# Altium PCB LANA_TNY_00.PcbDoc
Units mm, origin at the board's own origin, x right, y up, seen from the top; angles counter-clockwise.
Board outline 17.78 x 20.32 mm, 2 copper layers (Top Layer, Bottom Layer), stack 0.821 mm thick; 31 components, 32 nets, 148 pads, 33 vias.
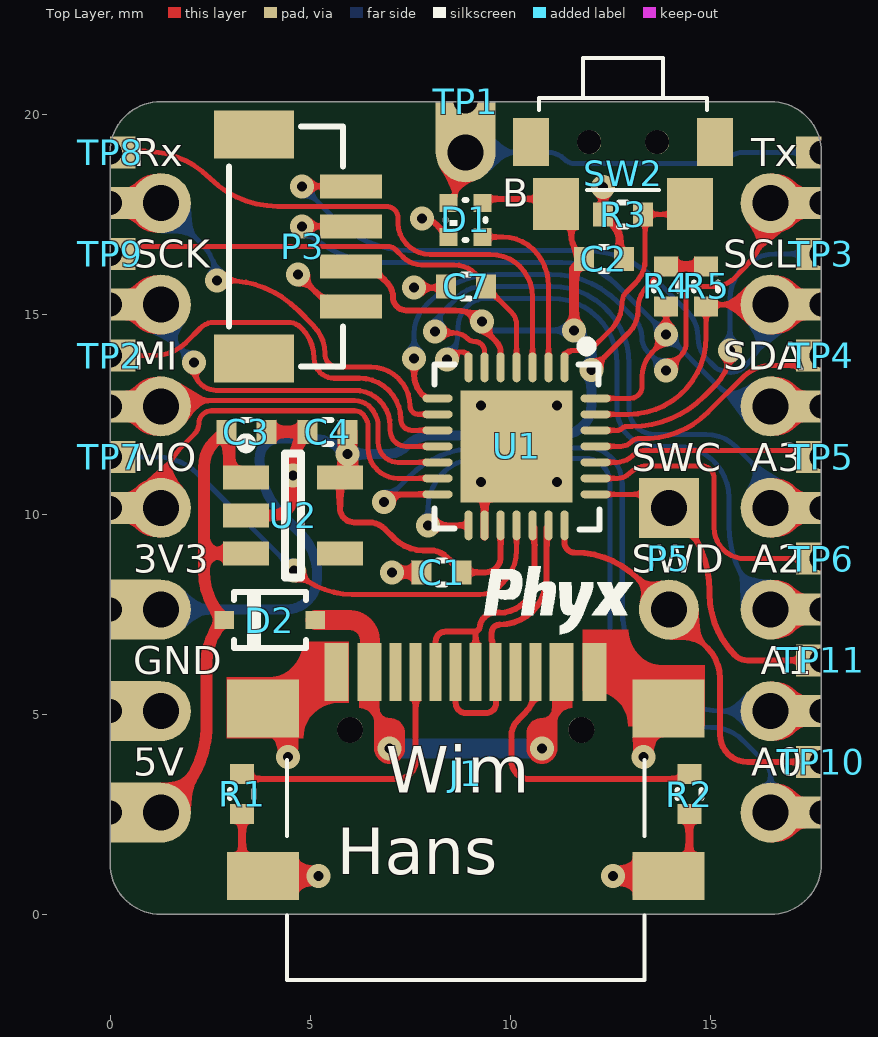
[diagram p0: Top Layer view]
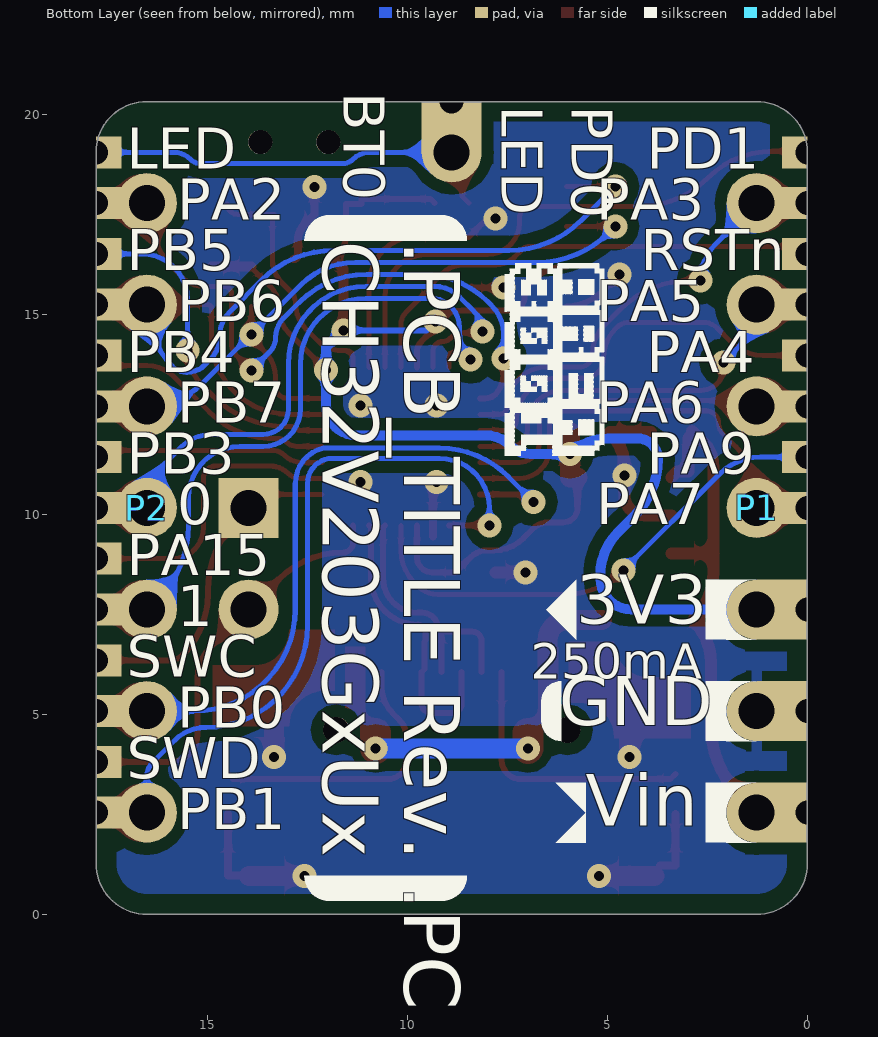
[diagram p1: Bottom Layer view, seen from below]

## Layer stack, top to bottom
Top Solder: solder mask 0.0102, Solder Resist, Dk 3.5
Top Layer: signal copper 0.0356
Dielectric1: core 0.75, FR-4, Dk 4.8
Bottom Layer: signal copper 0.0356
Bottom Solder: solder mask 0.0102, Solder Resist, Dk 3.5

## Board outline
0,1.27 0,19.05 cw(c1.27,19.05) 1.27,20.32 16.51,20.32 cw(c16.51,19.05) 17.78,19.05 17.78,1.27 cw(c16.51,1.27) 16.51,0 1.27,0 cw(c1.27,1.27)

## Design rules (kind name [scope] priority, off if disabled: settings)
BoardOutlineClearance [NOT OnLayer('Top Overlay') AND NOT OnLayer('Bottom Overlay') AND NOT IsText] p1: gap=0.5 ignorepadtopadclearanceinfootprint=FALSE except(0: Arc-SplitContinuation Track-SplitContinuation SMDPad-SplitContinuation THPad-SplitContinuation Via-SplitContinuation Fill-SplitContinuation Poly-SplitContinuation Region-SplitContinuation Text-SplitContinuation; 0.25: Track-OutlineEdge SMDPad-OutlineEdge THPad-OutlineEdge)
Clearance [All] p1: gap=0.15 ignorepadtopadclearanceinfootprint=FALSE except(0: Arc-Hole Track-Hole SMDPad-Hole THPad-Hole Via-Hole Fill-Hole Poly-Hole Region-Hole Text-Hole; 0.127: Arc-Arc Arc-Track Arc-SMDPad Arc-THPad Arc-Via Arc-Region Track-Track Track-SMDPad Track-THPad Track-Via Track-Region SMDPad-SMDPad; 0.25: SMDPad-Poly Poly-Region; 0.3: Arc-Poly Track-Poly THPad-Poly Via-Poly Fill-Poly; 0.5: Poly-Poly)
ComponentClearance ComponentClearance_J2/D6/D10 [InComponent('J2') vs InComponent('D6') OR InComponent('D10')] p1: gap=0.254 collisioncheckmode=3 verticalgap=0 showdistances=FALSE
ComponentClearance [All] p2: gap=0.254 collisioncheckmode=3 verticalgap=0.254 showdistances=FALSE
DiffPairsRouting [All] p1: maxlimit=0.15 minlimit=0.15 mostfreqgap=0.15 toplayer_minwidth=0.15 toplayer_maxwidth=0.15 toplayer_prefwidth=0.15 bottomlayer_minwidth=0.15 bottomlayer_maxwidth=0.15 bottomlayer_prefwidth=0.15 maxuncoupledlength=12.7
HoleSize [All] p1: absolutevalues=TRUE maxlimit=10 minlimit=0.025 maxpercent=80.000 minpercent=20.000
PolygonConnect PolygonConnect_VIA [IsVia] p1: connectstyle=Direct reliefconductorwidth=0.254 reliefentries=4 polygonreliefangle="90 Angle" airgapwidth=0.254
PolygonConnect [All] p2: connectstyle=Relief reliefconductorwidth=0.254 reliefentries=4 polygonreliefangle="90 Angle" airgapwidth=0.254
RoutingVias [All] p1: holewidth=0.3 width=0.7 viastyle="Through Hole" minholewidth=0.3 minwidth=0.2 maxholewidth=0.6 maxwidth=1.2
SilkToSolderMaskClearance SilkscreenOverComponentPads [IsPad] p1: minsilkscreentomaskgap=0.254 clearancetoexposedcopper=TRUE
SolderMaskExpansion [All] p1: expansion=0.05 istentingtop=FALSE
Width [All] p1: maxlimit=5 minlimit=0.127 preferedwidth=0.25
26 further rules are at their usual default settings.

## Classes and differential pairs
net class 90r: USB.D_n USB.D_p
net class POWER: GND VSYS VUSB
differential pair USB.D: +USB.D_p -USB.D_n

## Components (designator, comment, footprint, x,y, rotation, side; value= is the part's Value field where it differs from the comment)
C1 "CAP_CERAMIC" C0402 8.29,8.55 r180 top value="100nF 16V"
C2 "CAP_CERAMIC" C0402 12.344,16.383 r0 top value="100nF 16V"
C3 "CAP_CERAMIC" C0402 3.404,12.062 r0 top value="1uF 10V"
C4 "CAP_CERAMIC" C0402 5.436,12.062 r180 top value="1uF 10V"
C7 "CAP_CERAMIC" C0402 8.9,15.7 r180 top value="100nF 16V"
D1 "WS2812 based digital RGB LED 1010 package" LED_1010_WS2812B 8.89,17.358 r0 top value=XL-1010RGBC-WS2812B
D2 "CUS10S30 Schottky Power Rectifier, 1A, 30V" SOD-323_AC 3.991,7.355 r180 top value=CUS10S30,H3F
J1 "USB 2.0 C Reversible Receptacle Horizontal full SMD" XUNPU-TYPEC-304S-ACP16 8.89,3.51 r0 top value=TYPEC-304S-ACP16
P1 "Header 7" HDR1X7 1.27,2.54 r90 bottom
P2 "Header 7" HDR1X7 16.51,2.54 r90 bottom
P3 "Header 1.0mm Shrouded 4" WE_665304124022 6.025,15.2 r270 top value=665304124022
P5 "Header 2" HDR1X2 13.97,10.16 r270 top
R1 "RESISTOR" R0402 3.302,3.002 r90 top value=5K1
R2 "RESISTOR" R0402 14.478,3.002 r90 top value=5K1
R3 "RESISTOR" R0402 12.827,17.5 r180 top value=5K1
R4 "RESISTOR" R0402 13.9,15.7 r270 top value=5K1
R5 "RESISTOR" R0402 14.9,15.7 r270 top value=5K1
SW2 "TS24CA RA Tactile Switch 12V 50mA" SHOU_HAN_TS24CA 12.827,19.304 r0 top value=TS24CA
TP1 "TEST_PAD" TP_0.4mm 8.89,20.32 r0 top value="NO BOM"
TP2 "TEST_PAD" TP_0.4mm 0,13.97 r90 top value="NO BOM"
TP3 "TEST_PAD" TP_0.4mm 17.78,16.51 r90 top value="NO BOM"
TP4 "TEST_PAD" TP_0.4mm 17.78,13.97 r90 top value="NO BOM"
TP5 "TEST_PAD" TP_0.4mm 17.78,11.43 r90 top value="NO BOM"
TP6 "TEST_PAD" TP_0.4mm 17.78,8.89 r90 top value="NO BOM"
TP7 "TEST_PAD" TP_0.4mm 0,11.43 r90 top value="NO BOM"
TP8 "TEST_PAD" TP_0.4mm 0,19.05 r90 top value="NO BOM"
TP9 "TEST_PAD" TP_0.4mm 0,16.51 r90 top value="NO BOM"
TP10 "TEST_PAD" TP_0.4mm 17.78,3.81 r90 top value="NO BOM"
TP11 "TEST_PAD" TP_0.4mm 17.78,6.35 r90 top value="NO BOM"
U1 "WCH CH32V203G8U6 QFN28 RISC-V 32-bit MCU, 64KB Flash, 20KB RAM, USB, CAN" QFN_28_4.0x4.0_P0.4 10.16,11.7 r270 top value=CH32V203G8U6
U2 "3V3 LDO 300mA 150mV" SOT23-5 4.572,9.976 r0 top value=RT9078-33GJ5

## Footprints (in the part's own frame and the unit in brackets; to place one, negate y for a bottom-side part, rotate by r counter-clockwise, add the part's x,y. Pads: shape width x height; smd on the part's side, far side on the other; paste and mask are expansions set on the pad)
C0402 [mm]
  rect 0.5x0.6 smd: 1(-0.5,0) 2(0.5,0)
  silkscreen extent -0.1,-0.3 0.1,0.3, body extent -0.5,-0.25 0.5,0.25, height 0.5
HDR1X2 [mm] "Connector; Header; 2 Position"
  rect 1.5x1.5 hole 0.9: 1(0,0)
  round 1.5 hole 0.9: 2(2.54,0)
  body extent -1.17,-1.25 3.91,1.25, height 8.2
HDR1X7 [mm] "Connector; Header; 7 Position"
  round 1.5 hole 0.9: 1(0,0) 2(2.54,0) 3(5.08,0) 4(7.62,0) 5(10.16,0) 6(12.7,0) 7(15.24,0)
  body extent -1.27,-1.14 16.51,1.14, height 8.13
LED_1010_WS2812B [mm] "1010 WS2812B based RGB LED"
  rect 0.45x0.45 smd: 1(-0.425,0.425) 2(0.425,0.425) 3(-0.425,-0.425) 4(0.425,-0.425)
  silkscreen extent -0.5,-0.5 0.5,0.5, body extent -0.5,-0.5 0.5,0.5, height 0.8
QFN_28_4.0x4.0_P0.4 [mm]
  oval 0.75x0.2 smd: 1(-1.975,1.2) 2(-1.975,0.8) 3(-1.975,0.4) 4(-1.975,0) 5(-1.975,-0.4) 6(-1.975,-0.8) 7(-1.975,-1.2) 15(1.975,-1.2) 16(1.975,-0.8) 17(1.975,-0.4) 18(1.975,0) 19(1.975,0.4) 20(1.975,0.8) 21(1.975,1.2)
  oval 0.2x0.75 smd: 8(-1.2,-1.975) 9(-0.8,-1.975) 10(-0.4,-1.975) 11(0,-1.975) 12(0.4,-1.975) 13(0.8,-1.975) 14(1.2,-1.975) 22(1.2,1.975) 23(0.8,1.975) 24(0.4,1.975) 25(0,1.975) 26(-0.4,1.975) 27(-0.8,1.975) 28(-1.2,1.975)
  rect 2.8x2.8 smd: 29(0,0)
  silkscreen extent -2.62,-2.05 2.07,2.07, body extent -2.07,-2.07 2.07,2.07, height 0.8
R0402 [mm]
  rect 0.5x0.6 smd: 1(-0.5,0) 2(0.5,0)
  silkscreen extent -0.1,-0.3 0.1,0.3, body extent -0.5,-0.25 0.5,0.25, height 0.35
SHOU_HAN_TS24CA [mm] "TS24CA tactile switch"
  rect 0.9x1.2 smd: 0(-2.3,0) 0(2.3,0)
  round 0.6 hole 0.6 unplated: 0(-0.85,0) 0(0.85,0)
  rect 1.15x1.3 smd: 1(-1.675,-1.55) 2(1.675,-1.55)
  silkscreen extent -2.1,-1.2 2.1,2.1, body extent -2.1,-1.2 2.1,2.1, height 1.8
SOD-323_AC [mm] "SOD-323"
  rect 0.49x0.45 smd: A(-1.14,0) C(1.14,0)
  silkscreen extent -0.9,-0.7 0.9,0.7, body extent -1.3,-0.68 1.3,0.68, height 1.1
SOT23-5 [mm] "SOT23, 5-Leads, Body 3,1x3,2mm (max), Pitch 0,95mm, IPC Medium Density"
  rect 1.15x0.6 smd: 1(-1.175,0.95) 2(-1.175,0) 3(-1.175,-0.95) 4(1.175,-0.95) 5(1.175,0.95)
  silkscreen extent -1.3,-1.55 0.2,1.92, body extent -1.4,-1.45 1.4,1.45, height 1.45
TP_0.4mm [mm] "0.4mm pad"
  round 0.4 smd mask+0.05: 1(0,0)
WE_665304124022 [mm]
  rect 0.6x1.55 smd: 1(0,0) 2(-1,0) 3(-2,0) 4(-3,0)
  rect 1.2x2 smd: Z1(-4.3,-2.425) Z2(1.3,-2.425)
  silkscreen extent -4.5,-3.05 1.5,-0.2, body extent -4.5,-3.1 1.5,0.5, height 4.35
XUNPU-TYPEC-304S-ACP16 [mm] "USB C Connector SMD"
  round 0.65 hole 0.65 unplated: 0(-2.89,1.102) 0(2.89,1.102)
  rect 0.3x1.45 smd: A1(-3.375,2.547) A4(-2.55,2.548) A5(-1.25,2.548) A6(-0.25,2.547) A7(0.25,2.547) A8(1.25,2.548) A9(2.55,2.547) A12(3.375,2.548) B1(3.075,2.547) B4(2.25,2.548) B5(1.75,2.548) B6(0.75,2.547) B7(-0.75,2.547) B8(-1.75,2.548) B9(-2.25,2.547) B12(-3.075,2.548)
  rect 1.8x1.45 smd: MH1(-5.07,1.632) MH4(5.07,1.632)
  rect 1.8x1.2 smd: MH2(-5.07,-2.548) MH3(5.07,-2.548)
  silkscreen extent -4.47,-5.15 4.47,0.35, body extent -4.5,-5.15 4.44,2.75, height 3.26

## Part data
C1 C2 C7: library part "CAP # 100nF 16V 0402", "Capacitor Ceramic", Supplier Part Number 1=1758896, Supplier 1=Farnell, Supplier 3=Generic, Supplier Part Number 3="100nF 16V 0402 X7R"
C3 C4: library part "CAP # 1uF 10V 0402", "Capacitor Ceramic", Supplier Part Number 1=C380293, Supplier 1=LCSC, Supplier 3=Generic, Supplier Part Number 3="1uF 10V 0402 X5R"
D1: library part "LED # RGB XL-1010RGBC-WS2812B", "=Description", Supplier Part Number 1=C5349953, Supplier 1=LCSC
D2: library part "Schottky # CUS10S30", "=Description", Supplier Part Number 1=C146335, Supplier 1=LCSC
J1: library part "USB # C 2.0 RCPT TYPEC-304S-ACP16", Supplier Part Number 1=C720630, Supplier 1=LCSC
P1 P2: library part "Pin Header 2.54mm 7way"
P3: library part "HDR # SHR 1.0mm 4way - 665304124022", Supplier Part Number 1=665304124022, Supplier 1=Wurth, Supplier 2=Mouser, Supplier Part Number 2=710-665304124022
P5: library part "Pin Header 2.54mm 2way", Supplier Part Number 1=C492401, Supplier 1=LCSC, Supplier 2=LCSC, Supplier Part Number 2=C541856
R1 R2 R3 R4 R5: library part "RES # 5K1 0402", Supplier Part Number 1=C274895, Supplier 1=LCSC, Supplier 3=Generic, Supplier Part Number 3="5K1 1% 0402"
SW2: library part "SW # TACT RA TS24CA", Supplier Part Number 1=C393942, Supplier 1=LCSC
TP1 TP2 TP3 TP4 TP5 TP6 TP7 TP8 TP9 TP10 TP11: library part "TP # 0.4mm", Supplier Part Number 1="FOOTPRINT ONLY", Supplier 1=XXX
U1: library part "RISCV # CH32V203G8U6", Supplier Part Number 1=C5187530, Supplier 1=LCSC
U2: library part "LDO # 3V3 300mA RT9078-33GJ5", "=Designator", Supplier Part Number 1=C110427, Supplier 1=LCSC

## Free pads (board coordinates)
  rect 1.27x1.5 hole 0.6 copper offset 0.635,0: 0(0,2.54) 0(0,5.08) 0(0,7.62)
  rect 0.635x0.8 hole 0.6 copper offset 0.318,0: 0(0,10.16) 0(0,12.7) 0(0,15.24) 0(0,17.78)
  rect 0.635x0.8 hole 0.6 copper offset 0.318,0 mask+0.05: 0(0,11.43) 0(0,13.97) 0(0,16.51) 0(0,19.05)
  rect 1.5x1.27 hole 0.6 copper offset 0,-0.635: 0(8.89,20.32)
  rect 0.635x0.8 hole 0.6 copper offset -0.318,0: 0(17.78,2.54) 0(17.78,5.08) 0(17.78,7.62) 0(17.78,10.16) 0(17.78,12.7) 0(17.78,15.24) 0(17.78,17.78)
  rect 0.635x0.8 hole 0.6 copper offset -0.318,0 mask+0.05: 0(17.78,3.81) 0(17.78,6.35) 0(17.78,8.89) 0(17.78,11.43) 0(17.78,13.97) 0(17.78,16.51) 0(17.78,19.05)
  round 1.5 hole 0.9: 1(8.89,19.05)

## Via types
v1: diameter 0.6, hole 0.25, Top Layer to Bottom Layer, tented both sides, 33 vias

## Nets (pads, with @x,y where several pads share a name; then routed paths per layer and width w, separated by ;. In a path a pad name is that pad's centre, name@x,y a point inside that pad or via, vN(x,y) a via of type N, cw(c..) or ccw(c..) an arc to the next point about the centre after c; other vN are vias at no path point)
+3V3: C1.1 C2.1 C4.1 D1.2 P1.3 P3.2 pad.0@0,7.62 R4.1 R5.1 SW2.1 U1.5 U1.17 U2.5 | length 44.5
  Top Layer w0.127: v1(12.032,13.606) 12.97,14.544 ccw(c12.413,15.1) 13.2,15.1 13.2,15.151 cw(c13.972,15.151) 13.426,15.697 13.9,16.171 R4.1
  Top Layer w0.15: U2.5 5.747,10.153 ccw(c6.1,10.153) 6.1,9.8 6.464,9.8 cw(c6.464,9.229) 6.867,9.633 ; P3.2 cw(c6.025,15.017) 6.861,15.854 6.92,15.795 cw(c6.551,15.426) 7.072,15.426 ccw(c7.399,15.426) 7.399,15.1 8.631,15.1 cw(c8.631,14.158) v1(9.296,14.824) ccw(c9.659,14.824) 9.402,14.568 9.651,14.32 cw(c9.387,14.056) 9.76,14.056 U1.5 ; 6.867,9.633 7.1,9.4 ccw(c7.824,10.124) 7.824,9.1 8,9.1 cw(c8,8.52) 8.41,8.93 C1.1 9.382,8.55 ccw(c9.382,8.929) 9.76,8.929 U1.17 ; D1.2 9.415,17.883 11.152,17.883 SW2.1 11.532,17.754 11.532,16.967 ccw(c12.187,16.967) 11.724,16.504 C2.1 C2.1@11.862,16.366
  Top Layer w0.25: v1(11.6,14.6) 11.6,16.139 C2.1 ; R4.1 R5.1
  Top Layer w0.5: U2.5 5.939,10.926 v1(5.939,11.506) C4.1@5.939,12.062
  Bottom Layer w0.15: v1(9.296,14.824) 9.521,14.6 v1(11.6,14.6)
  Bottom Layer w0.25: P1.3 4.401,7.62 ccw(c4.401,8.387) 5.168,8.387 5.168,8.652 ccw(c3.641,8.47) 4.728,9.558 4.322,9.964 cw(c5.743,11.384) 3.734,11.384 cw(c4.25,11.384) 4.25,11.9 4.988,11.9 cw(c4.988,10.555) v1(5.939,11.506) ; v1(5.939,11.506) 6.932,11.506 ccw(c6.932,12.168) 7.4,11.7 cw(c8.066,11.034) 8.066,11.976 11.276,11.976 ccw(c11.276,12.732) 12.032,12.732 v1(12.032,13.606) 12.032,13.856 12.032,14.168 v1(11.6,14.6)
BOOT0: R3.1 SW2.2 U1.1 | length 6.2
  Top Layer w0.127: U1.1 11.36,13.908 cw(c11.548,13.908) 11.548,14.096 11.669,14.096 ccw(c11.669,14.886) 11.801,14.107 ccw(c11.669,14.886) 12.228,14.328 12.517,14.617 ccw(c11.834,15.3) 12.8,15.3 cw(c13.168,15.3) 12.908,15.56 13.145,15.797 ccw(c12.585,16.357) 13.206,15.866 ccw(c12.585,16.357) 13.376,16.357 13.376,17.451 ccw(c13.327,17.451) R3.1 14.248,17.5 ccw(c14.248,17.754) SW2.2
GND: C1.2 C2.2 C3.2 C4.2 C7.2 D1.3 J1.A1 J1.A12 J1.B1 J1.B12 J1.MH1 J1.MH2 J1.MH3 J1.MH4 P1.2 P3.1 pad.0@0,5.08 R1.1 R2.1 R3.2 U1.16 U1.29 U2.2 | length 21.7
  Top Layer w0.15: v1(4.7,16) 5.129,15.571 ccw(c6.025,16.467) P3.1 ; v1(7.597,15.664) 8.364,15.664 ccw(c8.364,15.7) C7.2 ; v1(7.8,17.4) cw(c7.8,16.922) 8.138,17.26 D1.3
  Top Layer w0.2: R1.1 3.302,1.224 J1.MH2@3.683,1.224 ; v1(9.271,10.811) cw(c9.056,10.596) 9.36,10.596 U1.16@9.36,9.45 ; v1(12.327,18.186) R3.2 12.563,17.264 cw(c12.145,16.846) 12.736,16.846 12.736,16.491 ccw(c12.844,16.491) C2.2 ; J1.MH3@13.97,0.97 14.478,0.97 R2.1
  Top Layer w0.3: U2.2 4.072,9.976 ccw(c4.072,10.476) 4.572,10.476 v1(4.572,10.976) 4.572,11.184 cw(c5.813,11.184) C4.2 C3.2 ; v1(7.05,8.55) C1.2
  Top Layer w0.5: J1.MH2 J1.MH2@4.438,0.963 ; J1.MH1 4.445,5.143 v1(4.445,3.933) ; J1.MH2@4.445,0.97 J1.MH2@4.438,0.963 ; v1(5.207,0.963) J1.MH2@4.438,0.963 ; v1(12.573,0.963) J1.MH3 ; v1(13.335,3.933) 13.335,5.143 J1.MH4
  other v1: 11.176,10.811 9.271,12.716 11.176,12.716
LED.DOUT: D1.1 pad.0@8.89,20.32 pad.0@17.78,19.05 pad.1 TP1.1 | length 10.2
  Top Layer w0.127: D1.1 8.627,17.945 8.627,18.646 8.89,18.909 pad.1
  Bottom Layer w0.127: pad.1 10.936,19.05 cw(c10.936,18.443) 11.365,18.872 ccw(c11.612,19.119) 11.612,18.77 15.171,18.77 ccw(c15.171,19.119) 15.418,18.872 cw(c15.847,18.443) 15.847,19.05 pad.0@17.472,19.05
NetJ1_A5: J1.A5 R1.2 | length 6.9
  Top Layer w0.15: R1.2 3.421,3.383 7.179,3.383 ccw(c7.179,3.844) 7.64,3.844 J1.A5
NetJ1_B5: J1.B5 R2.2 | length 7.2
  Top Layer w0.15: J1.B5 10.64,5.698 cw(c9.675,5.698) 10.357,5.015 10.191,4.849 ccw(c10.572,4.468) 10.033,4.468 10.033,3.826 ccw(c10.476,3.826) 10.476,3.383 14.359,3.383 R2.2
PA0: P2.4 pad.0@17.78,10.16 U1.6 | length 14.4
  Top Layer w0.127: v1(8.123,14.568) 8.156,14.535 8.591,14.535 cw(c8.591,14.034) 8.945,14.388 ccw(c9.119,14.561) 9.119,14.316 cw(c9.119,14.075) 9.36,14.075 U1.6
  Bottom Layer w0.127: v1(8.123,14.568) cw(c8.829,14.568) 8.33,15.068 8.702,15.441 cw(c9.329,14.814) 9.329,15.7 11.034,15.7 cw(c11.034,13.76) 12.974,13.76 12.974,12.626 ccw(c13.6,12.626) 13.6,12 14.896,12 cw(c14.896,10.952) 15.637,11.694 ; 15.637,11.693 16.043,11.287 cw(c14.916,10.16) P2.4
PA1: P2.3 pad.0@17.78,7.62 U1.7 | length 15.4
  Top Layer w0.127: v1(8.417,13.872) 8.471,13.926 cw(c8.8,13.598) 8.8,14.062 cw(c8.8,13.902) 8.96,13.902 U1.7
  Bottom Layer w0.127: v1@8.417,13.872 ccw(c7.733,14.555) 8.7,14.555 8.7,14.683 cw(c9.417,14.683) 8.802,15.052 cw(c9.417,14.683) 8.842,15.112 8.988,15.258 cw(c9.417,14.683) 9.417,15.4 11.034,15.4 cw(c11.034,13.76) 12.674,13.76 12.674,12.626 ccw(c13.6,12.626) 13.6,11.7 14.183,11.7 cw(c14.183,10.414) 15.469,10.414 15.469,9.714 ccw(c18.009,9.714) 16.213,7.917 P2.3
PA2: P2.7 pad.0@17.78,17.78 U1.8 | length 15.7
  Top Layer w0.127: v1(13.9,13.6) 14.267,13.967 ccw(c13.946,14.288) 14.4,14.288 14.4,15.523 cw(c14.577,15.523) 14.577,15.7 15.1,15.7 ccw(c15.1,16.424) 15.612,15.912 15.824,16.124 ccw(c14.168,17.78) P2.7
  Top Layer w0.15: v1(7.6,13.9) 7.6,13.483 ccw(c8.283,13.483) 7.8,13 ccw(c8.041,13.241) 8.041,12.9 U1.8
  Bottom Layer w0.127: v1(7.6,13.9) 7.6,14.515 cw(c8.596,14.515) 7.892,15.22 7.985,15.313 cw(c9.643,13.655) 9.643,16 11.01,16 cw(c11.01,13.61) 12.7,15.3 13.091,14.909 cw(c12.605,14.424) 13.292,14.424 ccw(c13.813,14.424) 13.299,14.337 ccw(c13.813,14.424) 13.444,14.056 ; 13.445,14.055 v1(13.9,13.6)
PA3: P1.7 pad.0@0,17.78 U1.9 | length 9.7
  Top Layer w0.127: v1(2.667,15.85) 2.898,15.85 cw(c2.898,13.31) 4.694,15.106 5.073,14.727 cw(c4.362,14.015) 5.368,14.015 5.368,14.011 ccw(c5.696,14.011) 5.696,13.682 6.518,13.682 cw(c6.518,12.7) 7.5,12.7 ccw(c7.7,12.7) 7.7,12.5 U1.9
  Bottom Layer w0.127: P1.7 2.29,16.76 cw(c1.379,15.85) v1(2.667,15.85)
PA4: pad.0@0,13.97 TP2.1 U1.10 | length 9.7
  Top Layer w0.127: pad.0@0.381,13.97 1.103,13.97 ccw(c1.103,15.097) 1.9,14.3 2.259,14.659 cw(c2.6,14.317) 2.6,14.8 4.432,14.8 cw(c4.432,14.296) 4.714,14.713 cw(c4.432,14.296) 4.788,14.652 ; 4.789,14.652 cw(c4.036,13.9) 5.1,13.9 ccw(c5.598,13.9) 5.598,13.402 6.237,13.402 cw(c6.237,12.373) 7.266,12.373 ccw(c7.539,12.373) 7.539,12.1 U1.10
PA5: P1.6 pad.0@0,15.24 U1.11 | length 9.1
  Top Layer w0.127: v1(2.1,13.8) 2.1,13.647 ccw(c2.647,13.647) 2.514,13.116 ccw(c2.647,13.647) 2.647,13.1 6.112,13.1 cw(c6.112,12.212) 7,12.212 7,12.1 ccw(c7.4,12.1) 7.4,11.7 U1.11
  Bottom Layer w0.127: P1.6 ccw(c2.743,15.24) 1.701,14.199 v1(2.1,13.8)
PA6: P1.5 pad.0@0,12.7 U1.12 | length 8
  Top Layer w0.127: P1.5 cw(c1.614,12.356) 1.614,12.842 6.112,12.842 cw(c6.112,12.3) 6.524,12.652 cw(c6.112,12.3) 6.579,12.576 cw(c6.058,12.2) 6.7,12.2 6.7,11.8 ccw(c7.2,11.8) 7.2,11.3 U1.12
PA7: P1.4 pad.0@0,10.16 U1.13 | length 9.8
  Top Layer w0.127: P1.4 1.27,10.42 cw(c3.08,10.42) 1.8,11.7 2.113,12.013 ccw(c1.86,12.265) 2.217,12.265 cw(c2.541,12.265) 2.541,12.588 6.112,12.588 cw(c6.112,12.3) 6.359,12.448 ccw(c6.579,12.576) 6.361,12.445 ccw(c6.579,12.576) 6.374,12.426 cw(c6.058,12.2) 6.446,12.2 6.446,11.654 ccw(c7.2,11.654) 7.2,10.9 7.704,10.9 U1.13
PA9: pad.0@0,11.43 TP7.1 U1.18 | length 12.3
  Top Layer w0.127: v1(4.6,8.6) ccw(c6.049,10.049) 6.049,8 9.251,8 ccw(c9.251,8.683) 9.734,8.2 9.822,8.288 ccw(c9.007,9.103) 10.16,9.103 U1.18
  Bottom Layer w0.127: pad.0@0.381,11.43 1.17,11.43 cw(c1.17,9.98) 2.195,11.005 v1(4.6,8.6)
PA15: pad.0@17.78,8.89 TP6.1 U1.23 | length 7.2
  Top Layer w0.127: U1.23 12.686,10.9 ccw(c12.686,11.317) 12.981,11.022 cw(c13.424,10.58) 13.283,11.189 cw(c13.424,10.58) 13.424,11.206 14.794,11.206 cw(c14.794,10.9) 15.1,10.9 15.1,9.665 ccw(c15.875,9.665) 15.875,8.89 pad.0@17.399,8.89
PB0: P2.2 pad.0@17.78,5.08 U1.14 | length 16.6
  Top Layer w0.15: v1(6.841,10.308) cw(c7.305,9.845) 7.305,10.5 U1.14
  Bottom Layer w0.127: v1(6.841,10.308) 7.474,10.941 cw(c9.2,9.215) 9.2,11.656 12.099,11.656 cw(c11.893,10.771) 12.802,10.771 12.802,7.62 ccw(c15.342,7.62) 15.342,5.08 P2.2
PB1: P2.1 pad.0@17.78,2.54 U1.15 | length 17.5
  Top Layer w0.15: v1@7.956,9.725 U1.15
  Bottom Layer w0.127: v1(7.95,9.719) 7.95,10.15 cw(c9.2,10.15) 9.2,11.4 11.867,11.4 cw(c11.867,10.771) 12.497,10.771 12.497,7.214 ccw(c15.037,7.214) 15.037,4.674 cw(c15.037,3.57) 15.337,4.632 cw(c15.037,3.57) 15.817,4.35 16.366,3.801 cw(c16.019,3.454) 16.51,3.454 P2.1
PB3: pad.0@17.78,11.43 TP5.1 U1.24 | length 5.3
  Top Layer w0.127: U1.24 12.652,11.3 ccw(c12.652,11.886) 13.066,11.472 cw(c13.376,11.162) 13.322,11.597 cw(c13.376,11.162) 13.376,11.6 17.379,11.6 pad.0@17.385,11.594
PB4: pad.0@17.78,13.97 TP4.1 U1.25 | length 6.1
  Top Layer w0.127: U1.25 12.772,11.7 ccw(c12.772,12.041) 13.014,11.8 cw(c13.255,11.559) 13.255,11.9 ccw(c13.368,14.124) 14.943,12.55 15.826,13.433 cw(c16.51,12.748) 16.51,13.716 17.272,13.716 pad.0@17.272,13.97
PB5: pad.0@17.78,16.51 TP3.1 U1.26 | length 8.3
  Top Layer w0.127: U1.26 12.678,12.1 ccw(c12.678,12.271) 12.798,12.15 cw(c12.919,12.029) 12.919,12.2 13.048,12.2 ccw(c13.048,14.74) 14.844,12.944 15.146,13.246 ccw(c14.293,14.1) v1(15.5,14.1)
  Bottom Layer w0.127: v1(15.5,14.1) 15.494,14.106 15.494,15.367 cw(c16.637,15.367) 16.637,16.51 17.399,16.51 pad.0@17.399,16.383
PB6: P2.6 P3.4 pad.0@17.78,15.24 R5.2 U1.27 | length 22.3
  Top Layer w0.127: v1(4.8,18.2) P3.4 ; U1.27 12.961,12.5 ccw(c12.961,14.439) 14.9,14.439 R5.2 cw(c14.997,15.103) 14.997,15.24 P2.6
  Bottom Layer w0.127: v1(4.8,18.2) 5.649,17.351 ccw(c7.463,19.165) 7.463,16.6 11.837,16.6 cw(c11.837,14.035) 13.651,15.849 14.433,15.067 cw(c13.788,14.422) 14.7,14.422 ccw(c15.509,14.422) 14.852,13.951 15.133,13.67 ccw(c15.515,14.222) 15.515,13.55 ccw(c15.515,14.053) 15.871,13.698 ccw(c14.329,15.24) P2.6
PB7: P2.5 P3.3 pad.0@17.78,12.7 R4.2 U1.28 | length 18.1
  Top Layer w0.127: v1(4.8,17.2) P3.3 ; U1.28 13,12.9 ccw(c13,13.2) 13.3,13.2 13.3,13.442 cw(c14.165,13.442) 13.553,14.053 13.9,14.4 v1(13.9,14.5) R4.2
  Bottom Layer w0.127: v1(4.8,17.2) 4.949,17.051 ccw(c6.763,18.865) 6.763,16.3 11.3,16.3 cw(c11.3,14.369) 12.666,15.734 v1(13.9,14.5) 15.127,13.273 ccw(c16.51,14.656) P2.5
PD0: D1.4 U1.2 | length 4.4
  Top Layer w0.127: D1.4 9.817,16.933 cw(c9.817,15.847) 10.585,16.615 cw(c9.68,15.71) 10.96,15.71 U1.2
PD1: pad.0@0,19.05 TP8.1 U1.3 | length 13.7
  Top Layer w0.127: pad.0@0.372,19.076 0.868,19.076 cw(c0.868,16.768) 2.5,18.4 ccw(c4.19,20.09) 4.19,17.7 6.9,17.7 cw(c6.9,17.4) 7.2,17.4 ccw(c7.995,17.301) 7.995,16.5 9.5,16.5 cw(c9.5,15.44) 10.56,15.44 U1.3
RSTn: C7.1 pad.0@0,16.51 TP9.1 U1.4 | length 11.6
  Top Layer w0.127: pad.0@0.445,16.691 0.454,16.7 6.937,16.7 cw(c6.937,16.419) 7.136,16.618 7.327,16.426 ccw(c7.789,16.888) 7.789,16.235 8.597,16.235 cw(c8.597,15.467) 9.14,16.01 C7.1@9.365,15.785 ; C7.1@9.365,15.785 cw(c9.279,15.7) C7.1 9.4,15.686 10.031,15.055 cw(c9.721,14.744) 10.16,14.744 U1.4
SWCLK: P5.1 pad.0@17.78,6.35 TP11.1 U1.22 | length 7.9
  Top Layer w0.127: U1.22 13.97,10.5 P5.1
  Top Layer w0.15: P5.1@14.242,9.888 cw(c12.446,8.092) 14.986,8.092 14.986,8.01 ccw(c17.154,8.01) 15.621,6.477 ccw(c15.928,6.784) 15.928,6.35 pad.0@17.501,6.35
SWDIO: P5.2 pad.0@17.78,3.81 TP10.1 U1.21 | length 9.9
  Top Layer w0.15: U1.21 11.36,9.287 ccw(c11.6,9.287) 11.6,9.047 cw(c11.6,6.771) 13.21,8.38 P5.2 14.933,6.657 cw(c14.176,5.9) 15.247,5.9 15.247,4.491 ccw(c15.928,4.491) 15.928,3.81 pad.0@17.501,3.81
USB.D_n: J1.A7 J1.B7 U1.19 | length 6.5
  Top Layer w0.15: J1.B7 8.14,6.824 cw(c8.382,6.824) 8.382,7.066 9.152,7.066 ; J1.A7 9.14,7.037 cw(c9.181,7.037) 9.152,7.066 ; U1.19 10.61,9.675 10.61,8.415 cw(c9.734,8.415) 9.734,7.539 9.625,7.539 ccw(c9.625,7.154) 9.24,7.154 9.152,7.066
USB.D_p: J1.A6 J1.B6 U1.20 | length 7.4
  Top Layer w0.15: J1.A6 8.64,5.284 ccw(c8.89,5.284) 8.89,5.034 9.398,5.034 ccw(c9.398,5.288) 9.652,5.288 9.652,6.057 J1.B6 9.565,6.132 9.565,6.826 9.54,6.851 9.54,7.045 cw(c9.734,7.045) 9.734,7.239 ccw(c9.734,8.415) 10.91,8.415 10.91,9.675 U1.20
VSYS: C3.1 D2.C P1.1 pad.0@0,2.54 U2.1 U2.3 | length 12.8
  Top Layer w0.3: P1.1 1.669,2.939 ccw(c-0.127,4.735) 2.409,4.593 2.409,6.288 cw(c3.918,6.288) D2.C cw(c4.082,8.586) 2.341,8.586 2.341,9.026 ; C3.1@2.879,12.087 2.61,11.818 ccw(c3.259,11.17) 2.341,11.17 2.341,9.026 ; C3.1@2.904,11.98 2.972,11.912 2.972,11.076 3.247,11.076 U2.1 ; U2.3 2.341,9.026
VUSB: D2.A J1.A4 J1.A9 J1.B4 J1.B9 | length 6.4
  Top Layer w0.5: D2.A 5.992,7.355 cw(c5.992,6.855) 6.492,6.855 J1.B9@6.492,5.895
  Bottom Layer w0.5: v1(6.985,4.145) v1(10.795,4.145)
pads on no net: J1.0 J1.A8 J1.B8 P3.Z1 P3.Z2 SW2.0 U2.4

## Polygon pours and split planes (outlines as drawn)
GND on Bottom Layer "GND_L02_P000" (solid, remove dead copper, pour order 0): 17.78,20.32 17.78,0 0,0 0,20.32

## Other copper
Top Layer:
  region net PA3: 1.27,17.78 1.27,18.517 1.187,18.517 ccw(c1.187,17.736) 0.635,18.288 cw(c0.328,18.595) 0.328,18.161 0.203,18.161 0.203,17.78
  region net PA3: 1.27,17.78 1.27,17.043 1.187,17.043 cw(c1.187,17.824) 0.635,17.272 ccw(c0.328,16.965) 0.328,17.399 0.203,17.399 0.203,17.78
  region net PA5: 1.27,15.24 1.27,15.977 1.187,15.977 ccw(c1.187,15.196) 0.635,15.748 cw(c0.328,16.055) 0.328,15.621 0.203,15.621 0.203,15.24
  region net PA5: 1.27,15.24 1.27,14.503 1.187,14.503 cw(c1.187,15.284) 0.635,14.732 ccw(c0.328,14.425) 0.328,14.859 0.203,14.859 0.203,15.24
  region net PA6: 1.27,12.7 1.27,13.437 1.187,13.437 ccw(c1.187,12.656) 0.635,13.208 cw(c0.328,13.515) 0.328,13.081 0.203,13.081 0.203,12.7
  region net PA6: 1.27,12.7 1.27,11.963 1.187,11.963 cw(c1.187,12.744) 0.635,12.192 ccw(c0.328,11.885) 0.328,12.319 0.203,12.319 0.203,12.7
  region net PA7: 1.27,10.16 1.27,10.897 1.187,10.897 ccw(c1.187,10.116) 0.635,10.668 cw(c0.328,10.975) 0.328,10.541 0.203,10.541 0.203,10.16
  region net PA7: 1.27,10.16 1.27,9.423 1.187,9.423 cw(c1.187,10.204) 0.635,9.652 ccw(c0.328,9.345) 0.328,9.779 0.203,9.779 0.203,10.16
  region net PB1: 16.51,2.54 16.51,3.277 16.593,3.277 cw(c16.593,2.496) 17.145,3.048 ccw(c17.452,3.355) 17.452,2.921 17.577,2.921 17.577,2.54
  region net PB1: 16.51,2.54 16.51,1.803 16.593,1.803 ccw(c16.593,2.584) 17.145,2.032 cw(c17.452,1.725) 17.452,2.159 17.577,2.159 17.577,2.54
  region net PB0: 16.51,5.08 16.51,5.817 16.593,5.817 cw(c16.593,5.036) 17.145,5.588 ccw(c17.452,5.895) 17.452,5.461 17.577,5.461 17.577,5.08
  region net PB0: 16.51,5.08 16.51,4.343 16.593,4.343 ccw(c16.593,5.124) 17.145,4.572 cw(c17.452,4.265) 17.452,4.699 17.577,4.699 17.577,5.08
  region net PA1: 16.51,7.62 16.51,8.357 16.593,8.357 cw(c16.593,7.576) 17.145,8.128 ccw(c17.452,8.435) 17.452,8.001 17.577,8.001 17.577,7.62
  region net PA1: 16.51,7.62 16.51,6.883 16.593,6.883 ccw(c16.593,7.664) 17.145,7.112 cw(c17.452,6.805) 17.452,7.239 17.577,7.239 17.577,7.62
  region net PA0: 16.51,10.16 16.51,10.897 16.593,10.897 cw(c16.593,10.116) 17.145,10.668 ccw(c17.452,10.975) 17.452,10.541 17.577,10.541 17.577,10.16
  region net PA0: 16.51,10.16 16.51,9.423 16.593,9.423 ccw(c16.593,10.204) 17.145,9.652 cw(c17.452,9.345) 17.452,9.779 17.577,9.779 17.577,10.16
  region net PB7: 16.51,12.7 16.51,13.437 16.593,13.437 cw(c16.593,12.656) 17.145,13.208 ccw(c17.452,13.515) 17.452,13.081 17.577,13.081 17.577,12.7
  region net PB7: 16.51,12.7 16.51,11.963 16.593,11.963 ccw(c16.593,12.744) 17.145,12.192 cw(c17.452,11.885) 17.452,12.319 17.577,12.319 17.577,12.7
  region net PB6: 16.51,15.24 16.51,15.977 16.593,15.977 cw(c16.593,15.196) 17.145,15.748 ccw(c17.452,16.055) 17.452,15.621 17.577,15.621 17.577,15.24
  region net PB6: 16.51,15.24 16.51,14.503 16.593,14.503 ccw(c16.593,15.284) 17.145,14.732 cw(c17.452,14.425) 17.452,14.859 17.577,14.859 17.577,15.24
  region net PA2: 16.51,17.78 16.51,17.043 16.593,17.043 ccw(c16.593,17.824) 17.145,17.272 cw(c17.452,16.965) 17.452,17.399 17.577,17.399 17.577,17.78
  region net PA2: 16.51,17.78 16.51,18.517 16.593,18.517 cw(c16.593,17.736) 17.145,18.288 ccw(c17.452,18.595) 17.452,18.161 17.577,18.161 17.577,17.78
  region net VUSB: 11.557,6.685 11.557,5.161 ccw(c11.557,4.78) 11.176,4.78 11.176,4.145 cw(c10.795,4.145) 10.795,3.764 cw(c10.795,4.145) 10.414,4.145 10.414,4.526 cw(c10.795,4.526) 10.795,4.907 ccw(c10.795,5.161) 11.049,5.161 11.049,6.685
  region net VUSB: 6.223,6.685 6.223,5.161 cw(c6.223,4.78) 6.604,4.78 6.604,4.145 ccw(c6.985,4.145) 6.985,3.764 ccw(c6.985,4.145) 7.366,4.145 7.366,4.526 ccw(c6.985,4.526) 6.985,4.907 cw(c6.985,5.161) 6.731,5.161 6.731,6.685
  region net GND: 5.969,6.812 5.969,5.288 5.715,5.288 ccw(c5.715,4.399) 4.826,4.399 2.921,4.399 2.921,5.923 3.937,5.923 ccw(c3.937,6.812) 4.826,6.812
  region net GND: 11.811,7.112 11.811,5.588 12.065,5.588 cw(c12.065,4.699) 12.954,4.699 14.859,4.699 14.859,6.223 13.843,6.223 cw(c13.843,7.112) 12.954,7.112

## Silkscreen, mask and mechanical layers (free items; w line width, h text height)
Top Overlay:
  drawing of 4 lines, arcs and shapes, not listed
  text "Rx" at 0.582,18.7 h0.7
  text "Tx" at 16.032,18.7 h0.7
  text "B" at 9.8,17.684 h0.7
  text "SCK" at 0.582,16.16 h0.7
  text "SCL" at 15.332,16.16 h0.7
  text "MI" at 0.582,13.62 h0.7
  text "SDA" at 15.332,13.62 h0.7
  text "MO" at 0.582,11.08 h0.7
  text "SWC" at 13.037,11.08 h0.7
  text "A3" at 16.032,11.08 h0.7
  text "3V3" at 0.582,8.54 h0.7
  text "SWD" at 13.037,8.54 h0.7
  text "A2" at 16.032,8.54 h0.7
  text "GND" at 0.582,6 h0.7
  text "A1" at 16.265,6 h0.7
  text "5V" at 0.582,3.46 h0.7
  text "A0" at 16.032,3.46 h0.7
  text "Wim" at 6.885,2.65 h2
  text "Hans" at 5.661,0.618 h2
Bottom Overlay:
  drawing of 17 lines, arcs and shapes, not listed
  text "BT0" at 11.926,20.548 h1.75 r90
  text "PD0 / LED" at 7.981,20.22 h1.75 r90
  text "PD1" at 4.012,18.3 h1.75
  text "LED" at 17.018,18.3 h1.75
  text "PA3" at 5.282,17.03 h1.75
  text "PA2" at 15.748,17.03 h1.75
  text ".PCB_TITLE Rev. .PCB_REV" at 10.544,16.844 h2.4 r90
  text "CH32V203GxUx" at 12.576,16.844 h2.4 r90
  text "RSTn" at 4.171,15.76 h1.75
  text "PB5" at 17.018,15.76 h1.75
  text "PA5" at 5.282,14.49 h1.75
  text "PB6" at 15.748,14.49 h1.75
  text "PA4" at 4.012,13.22 h1.75
  text "PB4" at 17.018,13.22 h1.75
  text "PA6" at 5.282,11.95 h1.75
  text "PB7" at 15.748,11.95 h1.75
  text "PA9" at 4.012,10.68 h1.75
  text "PB3" at 17.018,10.68 h1.75
  text "PA7" at 5.282,9.41 h1.75
  text "0" at 15.748,9.41 h1.75
  text "PA15" at 17.018,8.14 h1.75
  text "3V3" at 5.782,6.87 h2.1
  text "1" at 15.748,6.87 h1.75
  text "250mA" at 6.91,5.6 h1.5
  text "SWC" at 17.018,5.6 h1.75
  text "GND" at 6.199,4.33 h2.1
  text "PB0" at 15.748,4.33 h1.75
  text "SWD" at 17.018,3.06 h1.75
  text "Vin" at 5.536,1.79 h2.2
  text "PB1" at 15.748,1.79 h1.75
Top Solder:
  lines w0.4: 0,11.18 ccw(c0,11.43) 0,11.68 ; 0,13.72 ccw(c0,13.97) 0,14.22 ; 0,16.26 ccw(c0,16.51) 0,16.76 ; 0,18.8 ccw(c0,19.05) 0,19.3 ; 17.78,3.56 cw(c17.78,3.81) 17.78,4.06 ; 17.78,6.1 cw(c17.78,6.35) 17.78,6.6 ; 17.78,8.64 cw(c17.78,8.89) 17.78,9.14 ; 17.78,11.18 cw(c17.78,11.43) 17.78,11.68 ; 17.78,13.72 cw(c17.78,13.97) 17.78,14.22 ; 17.78,16.26 cw(c17.78,16.51) 17.78,16.76 ; 17.78,18.8 cw(c17.78,19.05) 17.78,19.3
Outline:
  the board outline again, w0.1
Fabrication:
  lines w0.254: 2.57,20.32 2.57,21.59 ; 3.078,20.574 2.57,20.955 ; 3.078,21.336 2.57,20.955 ; 5.872,20.574 6.38,20.955 ; 5.872,21.336 6.38,20.955 ; 6.38,20.32 6.38,21.59 ; 13.97,-1.27 13.97,0 ; 14.478,-1.016 13.97,-0.635 ; 14.478,-0.254 13.97,-0.635 ; 16.002,-1.016 16.51,-0.635 ; 16.002,-0.254 16.51,-0.635 ; 16.51,-1.27 16.51,0 ; 2.57,20.955 6.38,20.955 ; 13.97,-0.635 16.51,-0.635
  text "Mousebites in  / this region" at 1.3,21.688 h0.5
  text "Mousebites in  / this region" at 12.065,-3.302 h0.5
  text "White Solder Mask" at -57.5,-42 h1.5
  text "Black Silkscreen" at -57.5,-45 h1.5
  text "0.8mm Thickness" at -57.5,-48 h1.5
Frame:
  drawing of 15 lines, arcs and shapes, not listed
  text "Document" at 218.902,-66.311 h2
  text ".PCB_TITLE" at 220.402,-71.811 h3
  text "Layer Name" at 218.902,-76.311 h2
  text "<PANEL>" at 220.402,-81.811 h3
  text "Date" at 218.902,-86.311 h2
  text "Rev" at 258.902,-86.311 h2
  text ".Print_Date" at 221.902,-91.811 h3.5
  text ".PCB_REV" at 263.402,-91.811 h4
  text "Desginer" at 168.902,-96.311 h2
  text "Document" at 218.902,-96.311 h2
  text ".Pcb_File_Name_No_Path" at 220.402,-101.311 h1.5
  text ".PCB_ENGINEER" at 173.402,-101.811 h4
aisler-bridges:
  lines w0.056: 4.445,20.32 4.445,22.82 ; 15.24,-2.5 15.24,0

## Dimensions
17.78,19.05 to 0,17.78 on Fabrication
1.27,20.32 to 1.27,0 on Fabrication

## Text inside footprints (layer, text, board x,y; h text height)
J1: Comments "PCB Edge" at 6.59,-0.99 h0.61